# Altium PCB FinalPCB.PcbDoc (part 1 of 4)
Units mm, origin at the board's own origin, x right, y up, seen from the top; angles counter-clockwise.
Board outline 693.67 x 556.39 mm, 2 copper layers (Top Layer, Bottom Layer); 54 components, 53 nets, 276 pads, 0 vias.
Unrouted connection lines stored in the file: 5.
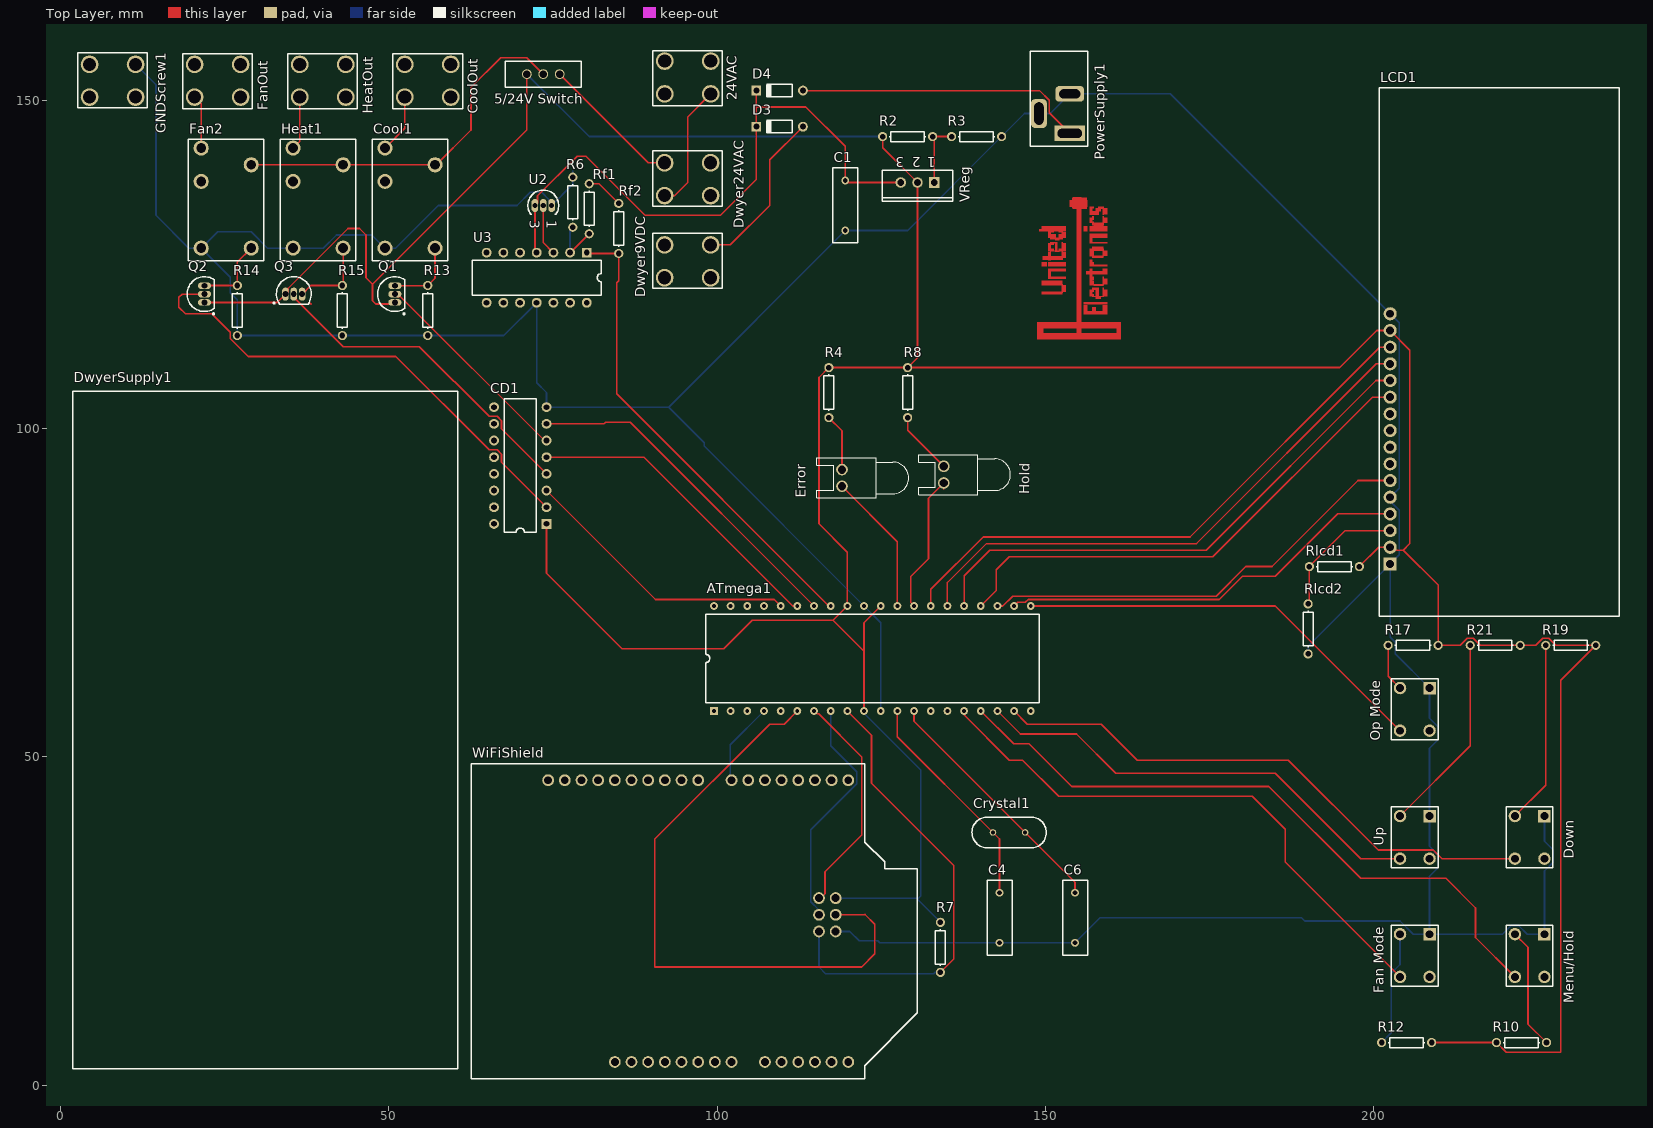
[diagram p0: Top Layer view]
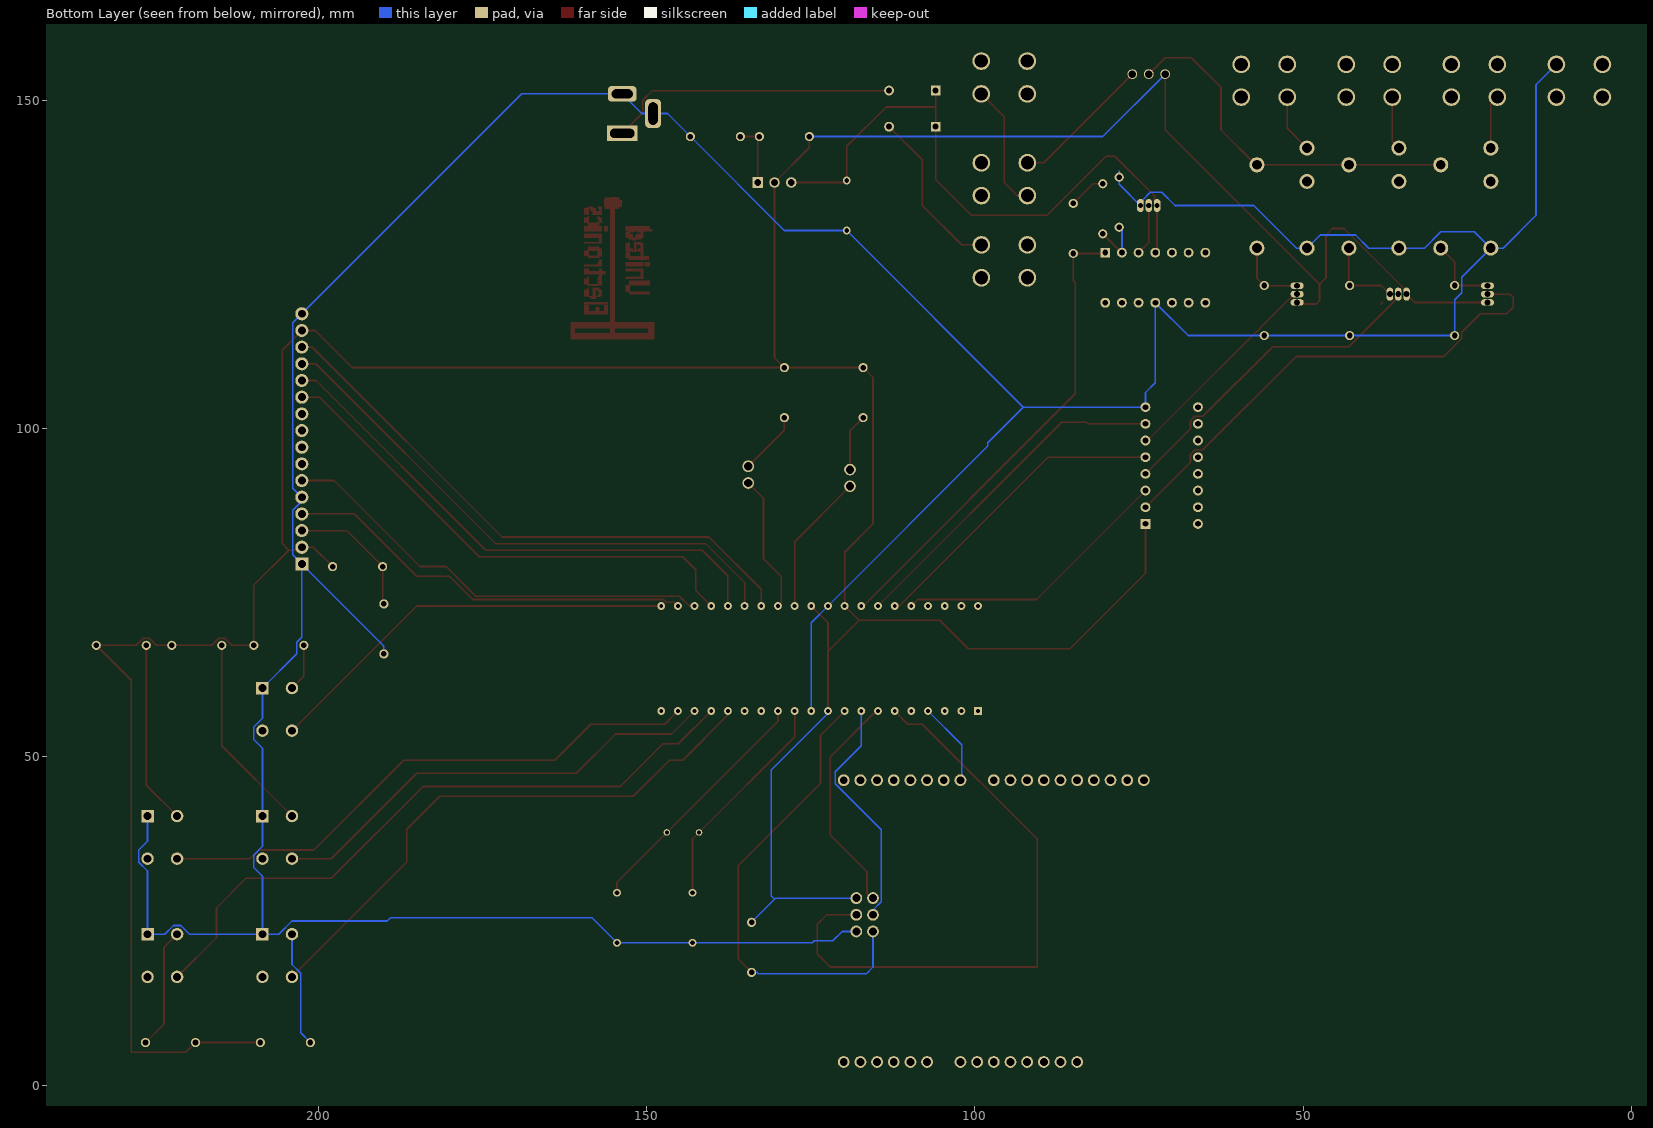
[diagram p1: Bottom Layer view, seen from below]

## Layer stack, top to bottom
Top Layer: signal copper 0.0356
Dielectric: dielectric 0.32, FR-4, Dk 4.8
Bottom Layer: signal copper 0.0356

## Board outline
-27.786,-180.594 -27.786,375.793 663.729,375.793 665.888,375.793 665.888,-158.115 665.888,-175.387 665.126,-175.387

## Design rules (kind name [scope] priority, off if disabled: settings)
Clearance [All] p1: gap=0.254
PolygonConnect [All] p1: connectstyle=Relief reliefconductorwidth=0.254 reliefentries=4 polygonreliefangle="90 Angle"
RoomDefinition NoWiFiPCB [InComponentClass('NoWiFiPCB')] p1: confinementstyle=ConfineIn formatcopy=TRUE lockcomponents=FALSE outline 0,0 243.5,0 243.5,158.5 0,158.5
RoutingVias [All] p1: holewidth=0.711 width=1.27 viastyle="Through Hole" minholewidth=0.711 minwidth=1.27 maxholewidth=0.711 maxwidth=1.27
SilkscreenOverComponentPads [All] p1: minsilkscreentomaskgap=0.254
SolderMaskExpansion [All] p1: expansion=0.102
Width [All] p1: maxlimit=0.254 minlimit=0.254 preferedwidth=0.254
27 further rules are at their usual default settings.

## Components (designator, comment, footprint, x,y, rotation, side; value= is the part's Value field where it differs from the comment)
"5/24V Switch" "Switch" Switch 76,154 r180 top (schematic designator Switch1)
24VAC "ScrewTerminal" ScrewTerminals 92,156 r270 top
ATmega1 "ATmega644" ATmega644 99.5,57 r90 top
C1 "Cap" RAD-0.3 119.5,134 r90 top
C4 "Cap" RAD-0.3 143,25.5 r90 top
C6 "Cap" RAD-0.3 154.5,25.5 r90 top
CD1 "CD4049" CD4049 74,85.5 r180 top
Cool1 "Relay" Relay 49.4,127.5 r0 top
CoolOut "ScrewTerminal" ScrewTerminals 52.4,155.5 r270 top
Crystal1 "16MHzCrystal" 16MHzCrystal 142,38.5 r0 top
D3 "Diode 1N914" DO-35 109.5,146 r180 top
D4 "Diode 1N914" DO-35 109.5,151.5 r180 top
Down "PushButton" PushButton 221.5,41 r270 top (schematic designator TempDown1)
Dwyer9VDC "ScrewTerminal" ScrewTerminals 99,123 r90 top
Dwyer24VAC "ScrewTerminal" ScrewTerminals 99,135.5 r90 top
DwyerSupply1 "DwyerSupply" DwyerSupply 60.5,2.5 r90 top
Error "LED0" LED-0 119,92.5 r90 top
Fan2 "Relay" Relay 21.4,127.5 r0 top
"Fan Mode" "PushButton" PushButton 204,23 r270 top (schematic designator Fan1)
FanOut "ScrewTerminal" ScrewTerminals 20.4,155.5 r270 top
GNDScrew1 "ScrewTerminal" ScrewTerminals 11.4,150.5 r90 top
Heat1 "Relay" Relay 35.4,127.5 r0 top
HeatOut "ScrewTerminal" ScrewTerminals 36.4,155.5 r270 top
Hold "HoldLED" LED-0 134.5,93 r90 top
LCD1 "LCD16x2" LCD 202.5,117.5 r180 top
Menu/Hold "PushButton" PushButton 221.5,23 r270 top (schematic designator Hold1)
"Op Mode" "PushButton" PushButton 204,60.5 r270 top (schematic designator OpMode1)
PowerSupply1 "PowerSupply" PowerSupply 154,143 r90 top
Q1 "NPN" TO-226-AA 50.9,120.5 r0 top
Q2 "NPN" TO-226-AA 21.9,120.5 r0 top
Q3 "NPN" TO-226-AA 35.5,120.5 r270 top
R2 "Res1" AXIAL-0.3 129,144.5 r180 top
R3 "Res1" AXIAL-0.3 139.5,144.5 r180 top
R4 "Res1" AXIAL-0.3 117,105.5 r270 top
R6 "Res1" AXIAL-0.3 78,134.5 r270 top
R7 "Res1" AXIAL-0.3 134,21 r90 top
R8 "Res1" AXIAL-0.3 129,105.5 r270 top
R10 "Res1" AXIAL-0.3 222.5,6.5 r0 top
R12 "Res1" AXIAL-0.3 205,6.5 r180 top
R13 "Res1" AXIAL-0.3 55.9,118 r270 top
R14 "Res1" AXIAL-0.3 26.9,118 r270 top
R15 "Res1" AXIAL-0.3 42.9,118 r270 top
R17 "Res1" AXIAL-0.3 206,67 r180 top
R19 "Res1" AXIAL-0.3 230,67 r180 top
R21 "Res1" AXIAL-0.3 218.5,67 r180 top
Rf1 "Res1" AXIAL-0.3 80.5,133.5 r270 top
Rf2 "Res1" AXIAL-0.3 85,130.5 r270 top
Rlcd1 "Res1" AXIAL-0.3 194,79 r0 top
Rlcd2 "Res1" AXIAL-0.3 190,69.5 r90 top
U2 "LM34CZ" Z03A 73.5,134 r270 top
U3 "LM324N" N14A 72.5,123 r180 top
Up "PushButton" PushButton 204,41 r270 top (schematic designator TempUp1)
VReg "LM317T" T03B 130.5,137.5 r180 top (schematic designator U1)
WiFiShield "WiFiShield" WiFiShield 62.5,49 r270 top

## Footprints (in the part's own frame and the unit in brackets; to place one, negate y for a bottom-side part, rotate by r counter-clockwise, add the part's x,y. Pads: shape width x height; smd on the part's side, far side on the other; paste and mask are expansions set on the pad)
16MHzCrystal [mm]
  round 1 hole 0.63: 0(0,0) 1(4.9,0)
  silkscreen extent -3.2,-2.32 8.13,2.32
ATmega644 [mm]
  rect 1.2x1.2 hole 0.58: 1(0,0)
  round 1.2 hole 0.58: 2(0,-2.54) 3(0,-5.08) 4(0,-7.62) 5(0,-10.16) 6(0,-12.7) 7(0,-15.24) 8(0,-17.78) 9(0,-20.32) 10(0,-22.86) 11(0,-25.4) 12(0,-27.94) 13(0,-30.48) 14(0,-33.02) 15(0,-35.56) 16(0,-38.1) 17(0,-40.64) 18(0,-43.18) 19(0,-45.72) 20(0,-48.26) 21(16,-48.26) 21(16,-48.26) 22(16,-45.72) 23(16,-43.18) 24(16,-40.64) 25(16,-38.1) 26(16,-35.56) 27(16,-33.02) 28(16,-30.48) 29(16,-27.94) 30(16,-25.4) 31(16,-22.86) 32(16,-20.32) 33(16,-17.78) 34(16,-15.24) 35(16,-12.7) 36(16,-10.16) 37(16,-7.62) 38(16,-5.08) 39(16,-2.54) 40(16,0)
  silkscreen extent 1.28,-49.53 14.72,1.27
AXIAL-0.3 [mm] "Axial Device, Thru-Hole; 2 Leads; 0.3 in Pin Spacing"
  round 1.4 hole 0.85: 1(-3.81,0) 2(3.81,0)
  silkscreen extent -2.77,-0.76 2.77,0.76
CD4049 [mm]
  rect 1.5x1.5 hole 0.86: 1(0,0)
  round 1.5 hole 0.86: 2(0,-2.54) 3(0,-5.08) 4(0,-7.62) 5(0,-10.16) 6(0,-12.7) 7(0,-15.24) 8(0,-17.78) 9(8,-17.78) 10(8,-15.24) 11(8,-12.7) 12(8,-10.16) 13(8,-7.62) 14(8,-5.08) 15(8,-2.54) 16(8,0)
  silkscreen extent 1.58,-19.05 6.42,1.27
DO-35 [mm] "Diode, Axial; Body 3.8 x 1.9 mm (LxDia. max), Lead Dia. 0.53 mm (max)"
  round 1.5 hole 0.9: 1(-3.55,0)
  rect 1.5x1.5 hole 0.9: 2(3.55,0)
  silkscreen extent -1.95,-0.95 2.05,0.95
DwyerSupply [mm]
  silkscreen extent 0,0 103.2,58.7
LCD [mm]
  rect 2x2 hole 1.2: 0(0,38.1)
  round 2 hole 1.2: 1(0,35.56) 1(0,35.56) 2(0,33.02) 3(0,30.48) 4(0,27.94) 5(0,25.4) 6(0,22.86) 7(0,20.32) 8(0,17.78) 9(0,15.24) 10(0,12.7) 11(0,10.16) 12(0,7.62) 13(0,5.08) 14(0,2.54) 15(0,0)
  silkscreen extent -34.93,-34.42 1.65,46.1
LED-0 [mil] "LED; 2 Leads"
  round 70 hole 50: 1(50,0) 2(-50,0)
  silkscreen extent -120,-400 120,150
N14A [mm] "DIP; 14 Leads; Row Spacing 7.62 mm; Pitch 2.54 mm"
  rect 1.5x1.5 hole 0.9: 1(-7.62,-3.81)
  round 1.5 hole 0.9: 2(-5.08,-3.81) 3(-2.54,-3.81) 4(0,-3.81) 5(2.54,-3.81) 6(5.08,-3.81) 7(7.62,-3.81) 8(7.62,3.81) 9(5.08,3.81) 10(2.54,3.81) 11(0,3.81) 12(-2.54,3.81) 13(-5.08,3.81) 14(-7.62,3.81)
  silkscreen extent -9.85,-2.65 9.85,2.65
PowerSupply [mm]
  rrect50% 4.4x2.4 hole 1.4 slot 3.4 at 0 deg: 1(5,5)
  rrect50% 2.4x4.4 hole 1.4 slot 3.2 at 90 deg: 2(8,0.3)
  rect 2.4x4.7 hole 1.4 slot 3.7 at 90 deg: 3(2,0.3)
  silkscreen extent 0,-2.4 14.5,6.3
PushButton [mm]
  rect 1.9x1.9 hole 1.2: 1(0,4.5)
  round 1.9 hole 1.2: 2(0,0) 3(6.5,0) 4(6.5,4.5)
  silkscreen extent -1.4,-1.3 7.9,5.8
RAD-0.3 [mm] "Radial Cap, Thru-Hole; 2 Leads; 0.3 in Pin Spacing"
  round 1.2 hole 0.7: 1(-3.81,0) 2(3.81,0)
  silkscreen extent -5.71,-1.91 5.71,1.91
Relay [mm]
  round 2.3 hole 1.5: 1(0,0) 2(7.62,0) 3(7.62,12.7) 4(0,15.24) 5(0,10.16)
  silkscreen extent -1.94,-1.9 9.56,16.6
ScrewTerminals [mm]
  round 2.7 hole 2: 0(0,0) 0(0,0) 1(0,7.01) 1(0,7.01) 2(5,7.01) 3(5,0)
  silkscreen extent -1.6,-1.8 6.8,8.8
Switch [mm]
  round 1.5 hole 1.1: 1(0,0) 2(2.5,0) 3(5,0)
  silkscreen extent -3.3,-2 8.3,2
T03B [mm] "TO, Thru-Hole, Vertical, Heatsink Mounted; 3 In-Line Leads; Pitch 2.54 mm"
  rect 1.6x1.6 hole 1: 1(-2.54,0)
  round 1.6 hole 1: 2(0,0) 3(2.54,0)
  silkscreen extent -5.35,-1.85 5.35,2.85
TO-226-AA [mm] "TO, Flat Index; 3 In-Line, Axial Leads; Body Dia. 4.8mm; Leads 0.55 x 0.51 mm (max)"
  oval 2x1 hole 0.9: 1(0,-1.27) 2(0,0) 3(0,1.27)
  silkscreen extent -2.65,-3.13 1.52,2.65, body extent -2.66,-2.66 1.52,2.66, height 5.33
WiFiShield [mm]
  round 1.8 hole 1.2: 0(2.54,57.46) 1(2.54,54.92) 1-MISO(20.5,53) 2(2.54,52.38) 3(2.54,49.84) 3.3V(45.46,29.52) 4(2.54,47.3) 5(2.54,44.76) 5V(45.46,32.06) 6(2.54,42.22) 7(2.54,39.68) 8(2.54,34.6) 9(2.54,32.06) 10(2.54,29.52) 11(2.54,26.98) 12(2.54,24.44) 13(2.54,21.9) +5(20.5,55.54) A0(45.46,44.76) A1(45.46,47.3) A2(45.46,49.84) A3(45.46,52.38) A4(45.46,54.92) A5(45.46,57.46) AREF(2.54,16.82) GND(2.54,19.36) GND(25.58,55.54) GND(45.46,34.6) GND(45.46,37.14) MOSI(23.04,55.54) N/A(45.46,21.9) N/A(45.46,24.44) RESET(25.58,53) RESET(45.46,26.98) SCK(23.04,53) SCL(2.54,11.74) SDA(2.54,14.28) Vin(45.46,39.68)
  silkscreen extent 0,0 48,68
Z03A [mm] "TO, Flat Index; 3 In-Line, Axial Leads; Body Dia. 4.6mm; Leads 0.53 x 0.39 mm (max)"
  oval 2x1 hole 0.8: 1(0,1.27) 2(0,0) 3(0,-1.27)
  silkscreen extent -2.34,-2.34 1.35,2.34

## Part data
C1 C4 C6: "Capacitor"
D3 D4: "High Conductance Fast Diode"
Error: "Typical INFRARED GaAs LED"
Hold: library part LED0, "Typical INFRARED GaAs LED"
Q1 Q2 Q3: "NPN Bipolar Transistor"
R2 R3 R4 R6 R7 R8 R10 R12 R13 R14 R15 R17 R19 R21 Rf1 Rf2 Rlcd1 Rlcd2: "Resistor"
U2: "Precision Fahrenheit Temperature Sensor"
U3: "Low-Power Quad Operational Amplifier"
VReg: "3-Terminal Adjustable Regulator"

## Nets (pads, with @x,y where several pads share a name; then routed paths per layer and width w, separated by ;. In a path a pad name is that pad's centre, name@x,y a point inside that pad or via, vN(x,y) a via of type N, cw(c..) or ccw(c..) an arc to the next point about the centre after c; other vN are vias at no path point)
+5: "5/24V Switch.3" ATmega1.10 ATmega1.30 ATmega1.32 CD1.1 LCD1.1 LCD1.14 Q1.1 Q2.1 Q3.1 R2.2 R4.1 R7.2 R8.1 R10.1 R12.1 R17.1 R19.1 R21.1 Rlcd1.2 VReg.2 WiFiShield.+5 | length 613.6
  Top Layer w0.254: Q2.1@21.9,119.23 32.96,119.23 Q3.1@34.23,120.5 34.619,120.889 34.619,121.365 43.754,130.5 45.5,130.5 46.5,129.5 46.5,123 47.5,122 ; 37.9,119.23 38.13,119 ; Q1.1@50.9,119.23 50.67,119 48,119 47.5,119.5 47.5,122 ; 71,154 71,145.5 47.5,122 ; CD1.1@74,85.5 74,78 85.5,66.5 101,66.5 105.32,70.82 117.64,70.82 ; ATmega1.10@122.36,56.95 ATmega1.10@122.36,57 122.36,66.1 ; ATmega1.30@124.9,73 122.36,70.46 122.36,66.1 ; R2.2@125.19,144.5 125.19,142.81 VReg.2@130.5,137.5 130.5,110.81 R8.1@129,109.31 ; Rlcd1.2@197.81,79 200.75,81.94 LCD1.1@202.5,81.94 202.94,81.5 204.5,81.5 ; R12.1@208.81,6.5 R10.1@218.69,6.5 220.19,5 228.5,5 228.5,61.69 R19.1@233.81,67 227.719,67 226.638,68.081 225.742,68.081 224.661,67 R21.1@222.31,67 216.219,67 215.138,68.081 214.242,68.081 213.161,67 R17.1@209.81,67 209.81,76.19 204.5,81.5 ; 117.64,70.82 ATmega1.32@119.82,73 119.82,81.18 115.5,85.5 115.5,107.81 R4.1@117,109.31 R8.1@129,109.31 ; 117.64,70.82 122.36,66.1 ; R8.1@129,109.31 194.81,109.31 200.46,114.96 LCD1.14@202.5,114.96 205.5,111.96 205.5,82.5 204.5,81.5
  Bottom Layer w0.254: 71,154 80.5,144.5 R2.2@125.19,144.5 ; WiFiShield.+5@118.04,28.5 130.31,28.5 130.5,28.31 ; ATmega1.10@122.36,57 122.36,56.64 131,48 131,28.81 130.5,28.31 ; R7.2@134,24.81 130.5,28.31
+9: C1.2 D3.2 D4.2 U2.3 U3.4 VReg.3 | length 94.1
  Top Layer w0.254: U3.4@72.5,126.81 72.23,127.08 U2.3@72.23,134 72.619,134.389 72.619,135.458 78.661,141.5 80,141.5 89,132.5 100.5,132.5 105.95,137.95 D3.2@105.95,146 105.95,149 ; D4.2@105.95,151.5 105.95,149 ; VReg.3@127.96,137.5 119.81,137.5 C1.2@119.5,137.81 119.5,143 113.5,149 105.95,149
A\: CD1.2 Q2.2 | length 75.5
  Top Layer w0.254: Q2.2@21.9,120.5 18.5,120.5 18,120 18,118.5 19,117.5 23,117.5 25.819,114.681 25.819,113.742 28.561,111 51.04,111 65.249,96.791 66.468,96.791 67.131,96.128 67.131,94.909 CD1.2@74,88.04
B\: CD1.4 Q3.2 | length 50.8
  Top Layer w0.254: Q3.2@35.5,120.5 35.889,120.111 35.889,119.635 43.024,112.5 54.62,112.5 65.249,101.871 66.468,101.871 67.131,101.208 67.131,99.989 CD1.4@74,93.12
C\: CD1.6 Q1.2 | length 32.3
  Top Layer w0.254: Q1.2@50.9,120.5 51.289,120.111 51.765,120.111 73.676,98.2 CD1.6@74,98.2
COM: "5/24V Switch.2" Cool1.3 Fan2.3 Heat1.3 | length 56.1
  Top Layer w0.254: Fan2.3@29.02,140.2 Heat1.3@43.02,140.2 Cool1.3@57.02,140.2 57.2,140.2 62.5,145.5 62.5,152 67,156.5 71,156.5 73.5,154
COOL: ATmega1.34 CD1.7 | length 52.4
  Top Layer w0.254: CD1.7@74,100.74 82.74,100.74 83,101 86.74,101 ATmega1.34@114.74,73
DB4: ATmega1.24 LCD1.10 | length 77.4
  Top Layer w0.254: ATmega1.24@140.14,73 142.5,75.36 142.5,78.5 144.5,80.5 175.5,80.5 199.8,104.8 LCD1.10@202.5,104.8
DB5: ATmega1.25 LCD1.11 | length 81.8
  Top Layer w0.254: ATmega1.25@137.6,73 137.6,77.6 141.5,81.5 174.5,81.5 200.34,107.34 LCD1.11@202.5,107.34
DB6: ATmega1.26 LCD1.12 | length 84.8
  Top Layer w0.254: ATmega1.26@135.06,73 135.06,76.56 141,82.5 173,82.5 200.38,109.88 LCD1.12@202.5,109.88
DB7: ATmega1.27 LCD1.13 | length 87.8
  Top Layer w0.254: ATmega1.27@132.52,73 132.52,75.52 140.5,83.5 172,83.5 200.92,112.42 LCD1.13@202.5,112.42
EN: ATmega1.23 LCD1.5 | length 67.7
  Top Layer w0.254: ATmega1.23@142.68,73 143.5,73 145,74.5 176,74.5 180.5,79 184.5,79 197.6,92.1 LCD1.5@202.5,92.1
ERRORLED: ATmega1.29 Error.2 | length 21.7
  Top Layer w0.254: Error.2@119,91.23 127.44,82.79 ATmega1.29@127.44,73
FAN: ATmega1.36 CD1.3 | length 42.9
  Top Layer w0.254: CD1.3@74,90.58 90.599,73.981 108.679,73.981 ATmega1.36@109.66,73
FANBUTTON: "Fan Mode.3" ATmega1.16 | length 86.5
  Top Layer w0.254: ATmega1.16@137.6,57 137.6,56.4 144.5,49.5 146.5,49.5 152,44 181.5,44 186.5,39 186.5,34 204,16.5
GND: "Fan Mode.1" "Op Mode.1" ATmega1.11 ATmega1.31 C1.1 C4.1 C6.1 CD1.8 Cool1.1 Down.1 Fan2.1 GNDScrew1.3 Heat1.1 LCD1.0 LCD1.4 LCD1.15 Menu/Hold.1 PowerSupply1.1 PowerSupply1.2 R3.1 R6.1 R13.2 R14.2 R15.2 Rlcd2.1 U2.1 U3.11 Up.1 WiFiShield.GND | length 655.1
  Bottom Layer w0.254: GNDScrew1.3@11.4,155.5 14.5,152.4 14.5,132.5 19.5,127.5 Fan2.1@21.4,127.5 ; 78,139.31 78,137.23 U2.1@74.77,134 74.381,134.389 74.381,134.865 73.246,136 71.5,136 69.5,134 57.5,134 51,127.5 Cool1.1@49.4,127.5 47.4,129.5 42,129.5 40,127.5 Heat1.1@35.4,127.5 31.5,127.5 29,130 23.9,130 Fan2.1@21.4,127.5 ; WiFiShield.GND@118.04,23.42 120.2,23.42 121.62,22 124.46,22 124.77,21.69 C4.1@143,21.69 C6.1@154.5,21.69 158.31,25.5 189,25.5 189.5,25 204,25 206,23 208.5,23 ; ATmega1.11@124.9,57 124.9,70.46 ATmega1.31@122.36,73 98,97.36 98,97.87 92.59,103.28 ; Rlcd2.1@190,65.69 190,66.9 LCD1.0@202.5,79.4 ; Down.1@226,41 226,37.162 227.331,35.831 227.331,33.949 226,32.618 Menu/Hold.1@226,23 223.382,23 222.051,24.331 220.949,24.331 219.618,23 208.5,23 ; Fan2.1@21.4,127.5 25.819,123.081 25.819,120.729 26.9,119.648 R14.2@26.9,114.19 R15.2@42.9,114.19 R13.2@55.9,114.19 67.5,114.19 U3.11@72.5,119.19 72.5,107 74,105.5 CD1.8@74,103.28 92.59,103.28 ; 92.59,103.28 C1.1@119.5,130.19 129,130.19 R3.1@143.31,144.5 146.81,148 PowerSupply1.1@149,148 150.7,148 PowerSupply1.2@153.7,151 169,151 LCD1.15@202.5,117.5 203.881,116.119 203.881,90.941 LCD1.4@202.5,89.56 202.5,88.973 203.881,87.592 203.881,80.781 LCD1.0@202.5,79.4 ; LCD1.0@202.5,79.4 202.5,68.219 203.271,67.448 203.271,65.729 208.5,60.5 208.5,55.882 209.831,54.551 209.831,52.669 208.5,51.338 Up.1@208.5,41 208.5,36.382 209.831,35.051 209.831,33.169 208.5,31.838 208.5,23
HEAT: ATmega1.35 CD1.5 | length 47.6
  Top Layer w0.254: CD1.5@74,95.66 88.84,95.66 111.5,73 ATmega1.35@112.2,73
HOLDBUTTON: ATmega1.17 Menu/Hold.3 | length 100.8
  Top Layer w0.254: ATmega1.17@140.14,57 145.14,52 147.5,52 154,45.5 184,45.5 198,31.5 211,31.5 215.5,27 215.5,22.5 Menu/Hold.3@221.5,16.5
HOLDLED: ATmega1.28 Hold.2 | length 21
  Top Layer w0.254: ATmega1.28@129.98,73 129.5,73.48 129.5,77.5 132.19,80.19 132.19,89.42 Hold.2@134.5,91.73
LM34: ATmega1.33 Rf2.2 U3.1 | length 72.2
  Top Layer w0.254: U3.1@80.24,126.69 Rf2.2@85,126.69 85,122.55 84.69,122.24 84.69,105.31 117,73 ATmega1.33@117.28,73
MISO: ATmega1.7 | length 31.9
  Top Layer w0.254: 115.18,56.56 115.44,56.56 122,50 122,38.111 116.406,32.517 116.406,30
MOSI: ATmega1.6 WiFiShield.MOSI | length 94.7
  Top Layer w0.254: ATmega1.6@112.2,57 110.2,55 108,55 90.5,37.5 90.5,18 122,18 124,20 124,24.5 122.5,26 122.46,25.96 WiFiShield.MOSI@118.04,25.96
Net24VAC_2: 24VAC.2 Dwyer24VAC.1 | length 19.3
  Top Layer w0.254: Dwyer24VAC.1@91.99,135.5 93.5,135.5 95.5,137.5 95.5,147.49 24VAC.2@99.01,151
NetATmega1_12: ATmega1.12 C4.2 | length 34.1
  Top Layer w0.254: ATmega1.12@127.44,57 127.44,53.06 142,38.5 143,37.5 C4.2@143,29.31
NetATmega1_13: ATmega1.13 C6.2 Crystal1.1 | length 37.8
  Top Layer w0.254: ATmega1.13@129.98,57 129.98,55.42 Crystal1.1@146.9,38.5 154.5,30.9 C6.2@154.5,29.31
NetCool1_2: Cool1.2 Q1.3 R13.1 | length 11.2
  Top Layer w0.254: Q1.3@50.9,121.77 55.86,121.77 R13.1@55.9,121.81 57.02,122.93 Cool1.2@57.02,127.5
NetCool1_4: Cool1.4 CoolOut.3 | length 9
  Top Layer w0.254: Cool1.4@49.4,142.74 52.4,145.74 CoolOut.3@52.4,150.5
NetD3_1: D3.1 Dwyer9VDC.3 | length 25.6
  Top Layer w0.254: Dwyer9VDC.3@99,128 102,128 108,134 108,140.95 D3.1@113.05,146
NetD4_1: D4.1 PowerSupply1.3 | length 44.4
  Top Layer w0.254: D4.1@113.05,151.5 149.087,151.5 150.581,150.006 150.581,148.119 PowerSupply1.3@153.7,145
NetDwyer24VAC_2: "5/24V Switch.1" Dwyer24VAC.2 | length 21.6
  Top Layer w0.254: 76,154 89.5,140.5 Dwyer24VAC.2@91.99,140.5
NetError_1: Error.1 R4.2 | length 8.7
  Top Layer w0.254: R4.2@117,101.69 119,99.69 Error.1@119,93.77
NetFan1_2: "Fan Mode.2" R12.2 | length 17.7
  Bottom Layer w0.254: R12.2@201.19,6.5 202.669,7.979 202.669,17.051 204,18.382 204,23
NetFan2_2: Fan2.2 Q2.3 R14.1 | length 11.6
  Top Layer w0.254: Q2.3@21.9,121.77 21.94,121.81 R14.1@26.9,121.81 26.9,125.38 Fan2.2@29.02,127.5
NetFan2_4: Fan2.4 FanOut.3 | length 8.2
  Top Layer w0.254: FanOut.3@20.4,150.5 21.4,149.5 Fan2.4@21.4,142.74
NetHeat1_2: Heat1.2 Q3.3 R15.1 | length 12.4
  Top Layer w0.254: Q3.3@36.77,120.5 38.08,121.81 R15.1@42.9,121.81 43.02,121.93 Heat1.2@43.02,127.5
NetHeat1_4: Heat1.4 HeatOut.3 | length 8.2
  Top Layer w0.254: Heat1.4@35.4,142.74 36.4,143.74 HeatOut.3@36.4,150.5
NetHold1_2: Menu/Hold.2 R10.2 | length 18.5
  Top Layer w0.254: Menu/Hold.2@221.5,23 223.5,21 223.5,9.31 R10.2@226.31,6.5
NetHold_1: Hold.1 R8.2 | length 9.7
  Top Layer w0.254: R8.2@129,101.69 129,99.77 Hold.1@134.5,94.27
NetLCD1_2: LCD1.2 Rlcd1.1 Rlcd2.2 | length 20.3
  Top Layer w0.254: Rlcd2.2@190,73.31 190.19,73.5 Rlcd1.1@190.19,79 195.67,84.48 LCD1.2@202.5,84.48
NetOpMode1_2: "Op Mode.2" R17.2 | length 7.2
  Top Layer w0.254: R17.2@202.19,67 202.19,62.31 204,60.5
NetR2_1: R2.1 R3.2 VReg.1 | length 10
  Top Layer w0.254: VReg.1@133.04,137.5 133.04,144.27 R2.1@132.81,144.5 R3.2@135.69,144.5
NetR6_2: R6.2 Rf1.2 U3.2 | length 6.9
  Top Layer w0.254: U3.2@78.088,127.278 Rf1.2@80.5,129.69
  Bottom Layer w0.254: U3.2@77.58,126.81 R6.2@77.58,130.27
NetR19_2: Down.2 R19.2 | length 27.9
  Top Layer w0.254: Down.2@221.5,41 226.19,45.69 R19.2@226.19,67
NetR21_2: R21.2 Up.2 | length 30.4
  Top Layer w0.254: Up.2@204,41 214.69,51.69 R21.2@214.69,67
NetRf1_1: Rf1.1 Rf2.1 | length 5.7
  Top Layer w0.254: Rf1.1@80.5,137.31 82,137.31 Rf2.1@85,134.31
NetU2_2: U2.2 U3.3 | length 7.8
  Top Layer w0.254: U2.2@73.5,134 73.5,128.35 U3.3@75.04,126.81
OPMODE: "Op Mode.3" ATmega1.21 | length 64.1
  Top Layer w0.254: ATmega1.21@147.76,73 185,73 204,54
RESET: ATmega1.9 R7.1 WiFiShield.RESET | length 71.8
  Top Layer w0.254: ATmega1.9@119.82,57 123.5,53.32 123.5,46 136,33.5 136,19.19 R7.1@134,17.19
  Bottom Layer w0.254: WiFiShield.RESET@115.5,23.42 115.5,18 116.5,17 133,17 133.19,17.19 R7.1@134,17.19
RS: ATmega1.22 LCD1.3 | length 63.1
  Top Layer w0.254: ATmega1.22@145.22,73 145.784,73.564 146.936,73.564 147.354,73.981 176.481,73.981 180,77.5 185,77.5 194.52,87.02 LCD1.3@202.5,87.02
SCK: ATmega1.8 WiFiShield.SCK | length 36.1
  Bottom Layer w0.254: WiFiShield.SCK@115.5,25.96 115.5,26.688 114.219,27.969 114.219,38.907 121.241,45.929 121.241,47.741 117.28,51.702 ATmega1.8@117.28,57
SHAKE: ATmega1.4 | length 12.7
  Bottom Layer w0.254: 102,46.46 102,51.88 ATmega1.4@107.12,57
TEMPDOWN: ATmega1.19 Down.3 | length 85.6
  Top Layer w0.254: ATmega1.19@145.22,57 147.22,55 158.5,55 164,49.5 187,49.5 200.669,35.831 209.051,35.831 210.382,34.5 Down.3@221.5,34.5
TEMPUP: ATmega1.18 Up.3 | length 70.6
  Top Layer w0.254: ATmega1.18@142.68,57 146.18,53.5 154.718,53.5 160.718,47.5 185,47.5 198,34.5 Up.3@204,34.5
pads on no net: 24VAC.0 24VAC.1 24VAC.3 "Fan Mode.4" "Op Mode.4" ATmega1.1 ATmega1.2 ATmega1.3 ATmega1.5 ATmega1.14 ATmega1.15 ATmega1.20 ATmega1.37 ATmega1.38 ATmega1.39 ATmega1.40 CD1.9 CD1.10 CD1.11 CD1.12 CD1.13 CD1.14 CD1.15 CD1.16 Cool1.5 CoolOut.0 CoolOut.1 CoolOut.2 Crystal1.0 Down.4 Dwyer9VDC.0 Dwyer9VDC.1 Dwyer9VDC.2 Dwyer24VAC.0 Dwyer24VAC.3 Fan2.5 FanOut.0 FanOut.1 FanOut.2 GNDScrew1.0 GNDScrew1.1 GNDScrew1.2 Heat1.5 HeatOut.0 HeatOut.1 HeatOut.2 LCD1.6 LCD1.7 LCD1.8 LCD1.9 Menu/Hold.4 U3.5 U3.6 U3.7 U3.8 U3.9 U3.10 U3.12 U3.13 U3.14 Up.4 WiFiShield.0 WiFiShield.1 WiFiShield.1-MISO WiFiShield.2 WiFiShield.3 WiFiShield.3.3V WiFiShield.4 WiFiShield.5 WiFiShield.5V WiFiShield.6 WiFiShield.7 WiFiShield.8 WiFiShield.9 WiFiShield.10 WiFiShield.11 WiFiShield.12 WiFiShield.13 WiFiShield.A0 WiFiShield.A1 WiFiShield.A2 WiFiShield.A3 WiFiShield.A4 WiFiShield.A5 WiFiShield.AREF WiFiShield.N/A WiFiShield.SCL WiFiShield.SDA WiFiShield.Vin
copper on no net: | length 3061.8